# Altium PCB PCB1.PcbDoc
Units mm, origin at the board's own origin, x right, y up, seen from the top; angles counter-clockwise.
Board outline 87 x 17 mm, 2 copper layers (Top Layer, Bottom Layer), stack 1.571 mm thick; 19 components, 17 nets, 98 pads, 17 vias.
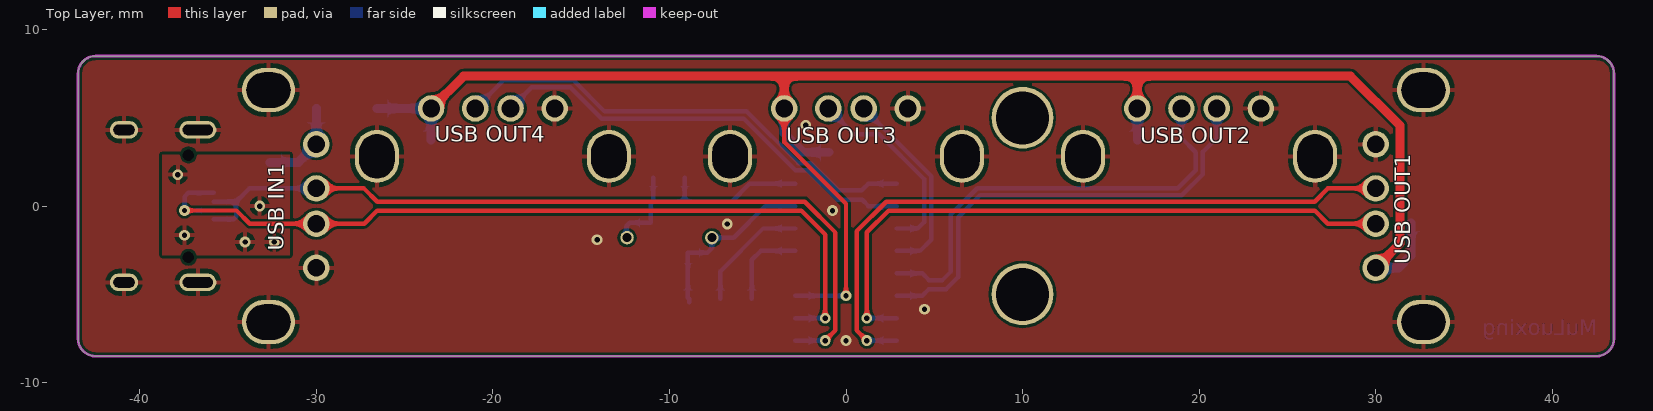
[diagram p0: Top Layer view]
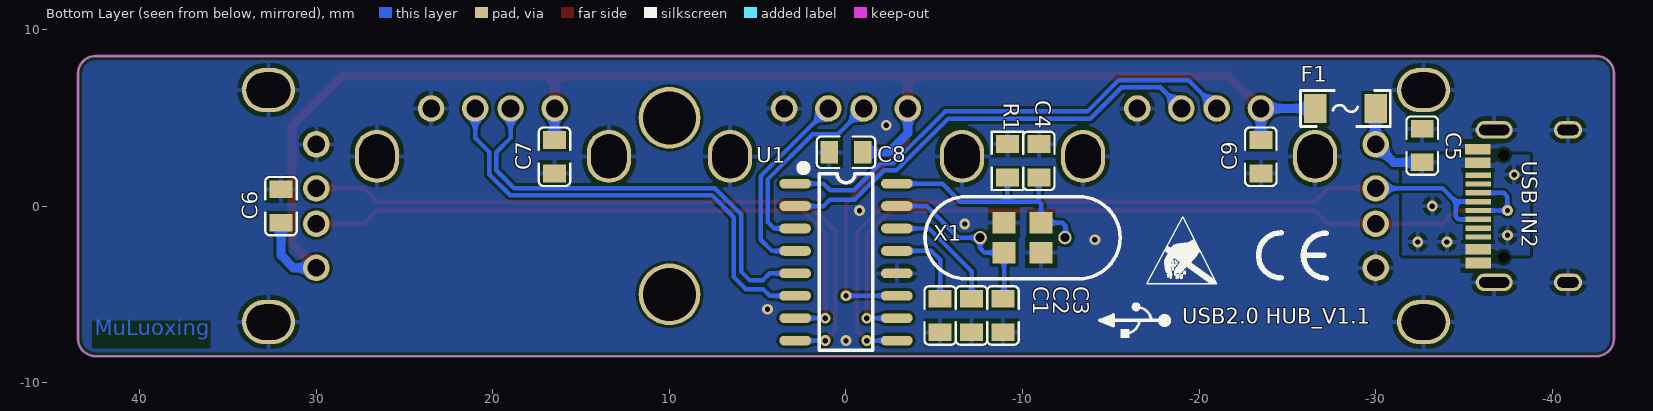
[diagram p1: Bottom Layer view, seen from below]
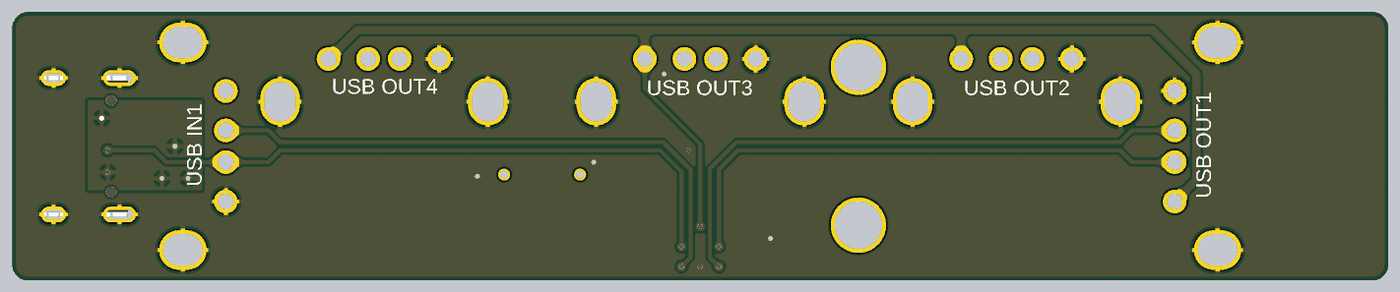
[diagram p2: 3D render of the assembled board from above, using the file's embedded part models]
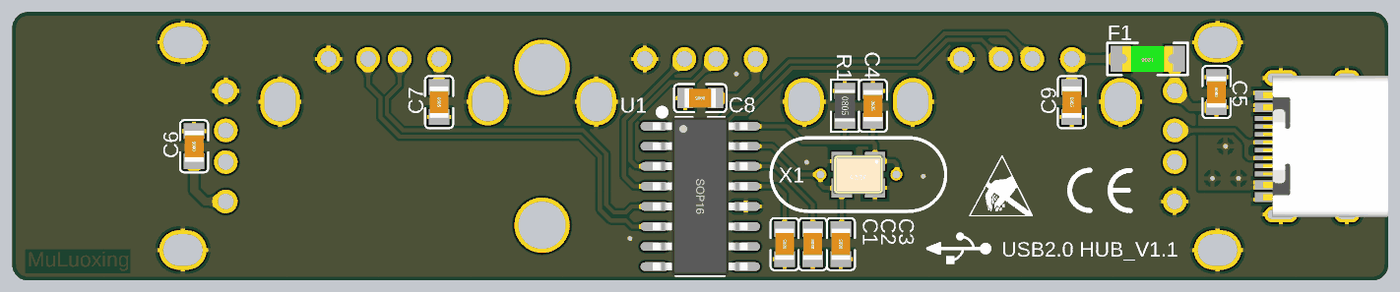
[diagram p3: 3D render of the assembled board from below, using the file's embedded part models]

## Layer stack, top to bottom
Top Solder: solder mask 0.0102, Solder Resist, Dk 3.5
Top Layer: signal copper 0.0356
Dielectric 1: dielectric 1.5, FR-4, Dk 4.8
Bottom Layer: signal copper 0.0356
Bottom Solder: solder mask 0.0102, Solder Resist, Dk 3.5

## Board outline
-43.5,-7.5 ccw(c-42.5,-7.5) -42.5,-8.5 42.5,-8.5 ccw(c42.5,-7.5) 43.5,-7.5 43.5,7.5 ccw(c42.5,7.5) 42.5,8.5 -42.5,8.5 ccw(c-42.5,7.5) -43.5,7.5

## Design rules (kind name [scope] priority, off if disabled: settings)
AssemblyTestPointUsage [All] p1 off:
AssemblyTestpoint [All] p1 off: testpointundercomponent=TRUE minsize=1.016 maxsize=2.54 preferedsize=1.524 minholesize=0 maxholesize=1.016 preferedholesize=0.813 testpointgrid=0.025 usegrid=TRUE gridtolerance=0 allowsidetop=TRUE allowsidebottom=TRUE
Clearance [All] p1: gap=0.152
ComponentClearance [All] p1 off: gap=0.254 collisioncheckmode=3 verticalgap=0.254 showdistances=FALSE
FabricationTestPointUsage [All] p1 off: valid=0 allowmultiple=FALSE
FabricationTestpoint [All] p1 off: side=3 testpointundercomponent=TRUE minsize=1.016 maxsize=2.54 preferedsize=1.524 minholesize=0 maxholesize=1.016 preferedholesize=0.813 testpointgrid=0.025 allowsidetop=TRUE allowsidebottom=TRUE usegrid=TRUE gridtolerance=0
Height [All] p1 off: minheight=0 maxheight=25.4 prefheight=12.7
HoleSize [All] p1 off: absolutevalues=TRUE maxlimit=2.54 minlimit=0.025 maxpercent=80.000 minpercent=20.000
HoleToHoleClearance [All] p1 off: gap=0.254 allowstackedmicrovias=TRUE
LayerPairs [All] p1 off: enforce=TRUE
MinimumSolderMaskSliver [All] p1 off: minsoldermaskwidth=0.254
NetAntennae [All] p1 off: netantennaetolerance=0
PlaneConnect [All] p1: planeconnectstyle=Relief reliefexpansion=0.508 reliefentries=4 reliefconductorwidth=0.508 reliefairgap=0.254
PolygonConnect [All] p1: connectstyle=Relief reliefconductorwidth=0.254 reliefentries=4 polygonreliefangle="90 Angle" airgapwidth=0.254
RoutingVias [All] p1: holewidth=0.711 width=1.27 viastyle="Through Hole" minholewidth=0.305 minwidth=0.61 maxholewidth=0.711 maxwidth=1.27
SilkToSilkClearance [All] p1 off: silktosilkclearance=0.254
SilkToSolderMaskClearance [IsPad] p1 off: minsilkscreentomaskgap=0.254 clearancetoexposedcopper=TRUE
SolderMaskExpansion [All] p1 off: expansion=0.102
Width [All] p1: maxlimit=0.762 minlimit=0.152 preferedwidth=0.254
16 further rules are at their usual default settings.

## Components (designator, comment, footprint, x,y, rotation, side; value= is the part's Value field where it differs from the comment)
C1 "10uF" "C 0805" -5.334,-6.199 r90 bottom
C2 "10uF" "C 0805" -7.112,-6.199 r90 bottom
C3 "20PF" "C 0805" -8.89,-6.199 r90 bottom
C4 "20PF" "C 0805" -10.922,2.564 r270 bottom
C5 "10uF" "C 0805" -32.639,3.429 r90 bottom
C6 "10uF" "C 0805" 32,0 r90 bottom
C7 "10uF" "C 0805" 16.51,2.794 r270 bottom
C8 "10uF" "C 0805" 0,3.048 r0 bottom
C9 "10uF" "C 0805" -23.495,2.794 r270 bottom
F1 "MSMD200-8V 2A" "FU 1206" -28.286,5.528 r0 bottom
R1 "0R" "R 0805" -9.144,2.564 r270 bottom
U1 "SL2.1A" SOP16_N 0,-3.175 r180 bottom
"USB IN1" "USB A" USB-A/S_A -30,0 r180 top
"USB IN2" "TYPE-C" "USB TYPE-C-16PIN_A" -40.894,0 r90 bottom
"USB OUT1" "USB A" USB-A/S_A 30,0 r0 top
"USB OUT2" "USB A" USB-A/S_A 20,5.528 r270 top
"USB OUT3" "USB A" USB-A/S_A 0,5.528 r270 top
"USB OUT4" "USB A" USB-A/S_A -20,5.528 r270 top
X1 "12MHz" OSC -10,-1.793 r0 bottom

## Footprints (in the part's own frame and the unit in brackets; to place one, negate y for a bottom-side part, rotate by r counter-clockwise, add the part's x,y. Pads: shape width x height; smd on the part's side, far side on the other; paste and mask are expansions set on the pad)
"C 0805" [mm] "贴片带丝印"
  rect 1x1.3 smd: 1(-0.95,0) 2(0.95,0)
  silkscreen extent -1.65,-0.89 1.65,0.89, body extent -1,-0.61 1,0.61, height 0.51
"FU 1206" [mil] "贴片保险丝"
  rect 50x65 smd: 1(-67.5,0) 2(67.5,0)
  silkscreen extent -100,-40 100,40, body extent -63,-32 63,32, height 34
OSC [mm]
  round 0.762 hole 0.508: 1(-2.4,0) 3(2.4,0)
  rect 1.3x1.2 smd: 1(-1.05,-0.85) 2(1.05,-0.85) 3(1.05,0.85) 4(-1.05,0.85)
  silkscreen extent -5.52,-2.32 5.52,2.33, body extent -1.6,-1.25 1.6,1.25, height 0.7
"R 0805" [mm] "贴片带丝印"
  rect 1x1.3 smd: 1(-0.95,0) 2(0.95,0)
  silkscreen extent -1.65,-0.89 1.65,0.89, body extent -1,-0.63 1,0.63, height 0.55
SOP16_N [mm] "10.3*6.2*1.8mm（长宽高）"
  oval 1.8x0.55 smd: 1(-2.877,4.445) 2(-2.877,3.175) 3(-2.877,1.905) 4(-2.877,0.635) 5(-2.877,-0.635) 6(-2.877,-1.905) 7(-2.877,-3.175) 8(-2.877,-4.445) 9(2.877,-4.445) 10(2.877,-3.175) 11(2.877,-1.905) 12(2.877,-0.635) 13(2.877,0.635) 14(2.877,1.905) 15(2.877,3.175) 16(2.877,4.445)
  silkscreen extent -2.57,-5 1.52,5.49, body extent -3,-5 3,5, height 1.9
"USB TYPE-C-16PIN_A" [mm]
  round 0 hole 0.65: 0(-2.89,3.65) 0(2.89,3.65)
  oval 1x1.6 hole 0.6 slot 1.2 at 90 deg: 1(-4.32,0) 1(4.32,0)
  oval 1x2.1 hole 0.6 slot 1.7 at 90 deg: 1(-4.32,4.18) 1(4.32,4.18)
  rect 0.3x1.45 smd: A1(-3.375,5.092) A4(-2.6,5.092) A5(-1.25,5.092) A6(-0.25,5.092) A7(0.25,5.092) A8(-1.75,5.092) A9(2.6,5.1) A12(3.375,5.1) B1(3.075,5.1) B4(2.3,5.1) B5(1.75,5.092) B6(0.75,5.092) B7(-0.75,5.092) B8(1.25,5.092) B9(-2.3,5.092) B12(-3.075,5.092)
  body extent -4.47,-2.6 4.47,5.3, height 3.25
USB-A/S_A [mm] "A型直插母头，"
  round 1.5 hole 1: 1(0,-3.5) 2(0,-1) 3(0,1) 4(0,3.5)
  oval 3x2.5 hole 2 slot 2.5 at 0 deg: 4(2.71,6.57) 4(2.71,-6.57)
  body extent -0.6,-7.34 13.7,7.34, height 6.8

## Part data
C1 C2 C3 C4 C5 C6 C7 C8 C9: library part Cap1
F1: library part FU, "贴片保险丝"
R1: library part Res
"USB IN2": library part "TYPE-C 16PIN"
X1: library part XTAL-4P, "4脚无源晶振"

## Free pads (board coordinates)
  round 3.5 hole 3: 0(10,-5) 0(10,5)

## Via types
v1: diameter 0.61, hole 0.305, Top Layer to Bottom Layer, tented both sides, 17 vias

## Nets (pads, with @x,y where several pads share a name; then routed paths per layer and width w, separated by ;. In a path a pad name is that pad's centre, name@x,y a point inside that pad or via, vN(x,y) a via of type N, cw(c..) or ccw(c..) an arc to the next point about the centre after c; other vN are vias at no path point)
5V: "USB OUT1.1" "USB OUT2.1" "USB OUT3.1" "USB OUT4.1" C6.1 C7.1 C8.1 C9.1 F1.2 U1.11 | length 99.2
  Top Layer w0.254: -3.5,5.528 -3.5,3.627 0,0.127 v1(0,-5.08)
  Top Layer w0.508: -23.5,5.528 -21.662,7.366 -3.5,7.366 ; -3.5,5.528 -3.5,7.366 ; 16.5,5.528 16.5,7.366 ; 30,-3.5 31.369,-2.131 31.369,4.572 28.575,7.366 16.5,7.366 ; -3.5,7.366 16.5,7.366
  Bottom Layer w0.254: U1.11 v1(0,-5.08)
  Bottom Layer w0.508: F1.2 -23.5,5.528 -23.495,5.523 C9.1 ; -3.5,5.528 -3.5,4.135 -2.413,3.048 C8.1 ; 16.5,5.528 16.51,5.518 C7.1 ; 30,-3.5 31.298,-3.5 32,-2.798 C6.1
DM: "USB IN1.2" "USB IN2.A7" "USB IN2.B7" U1.9 | length 46.8
  Top Layer w0.254: -30,1 -27.305,1 -26.559,0.254 -2.336,0.254 ; -2.336,0.238 -0.598,-1.5 -0.598,-7.036 v1(-1.182,-7.62)
  Bottom Layer w0.254: -35.802,-0.75 -34.684,-0.75 -34.544,-0.611 -34.544,0.25 ; -35.802,0.25 -34.544,0.25 ; -30,1 -33.794,1 -34.544,0.25 ; U1.9 v1(-1.182,-7.62)
DM1: "USB OUT1.2" U1.7 | length 36.2
  Top Layer w0.254: v1(1.182,-6.35) 1.182,-1.485 2.413,-0.254 26.543,-0.254 27.289,-1 30,-1
  Bottom Layer w0.254: v1(1.182,-6.35) U1.7
DM2: "USB OUT2.2" U1.5 | length 25.4
  Bottom Layer w0.254: U1.5 4.318,-3.81 4.699,-4.191 5.461,-4.191 5.944,-3.708 5.944,-0.467 7.426,1.016 18.796,1.016 19.812,2.032 19.812,3.048 19,3.86 19,5.528
DM3: "USB OUT3.2" U1.3 | length 11.2
  Bottom Layer w0.254: -1,5.528 0.317,4.212 0.464,4.064 1.89,4.064 4.42,1.534 4.42,-0.914 4.064,-1.27 U1.3
DM4: "USB OUT4.2" U1.1 | length 27.3
  Bottom Layer w0.254: -21,5.528 -19.391,7.137 -15.453,7.137 -13.675,5.359 -5.613,5.359 -2.692,2.438 -1.991,2.438 -0.441,0.889 0.889,0.889 1.27,1.27 U1.1
DP: "USB IN1.3" "USB IN2.A6" "USB IN2.B6" U1.10 | length 48.1
  Top Layer w0.254: v1(-37.465,-0.25) -34.523,-0.25 -33.774,-1 -30,-1 -27.289,-1 -26.543,-0.254 -2.54,-0.254 -1.182,-1.612 v1(-1.182,-6.35)
  Bottom Layer w0.254: -35.802,-0.25 v1(-37.465,-0.25) -37.465,0.532 -37.248,0.75 -35.802,0.75 ; U1.10 v1(-1.182,-6.35)
DP1: "USB OUT1.3" U1.8 | length 38.5
  Top Layer w0.254: v1(1.182,-7.62) 0.598,-7.036 0.598,-1.434 2.286,0.254 26.543,0.254 27.289,1 30,1
  Bottom Layer w0.254: v1(1.182,-7.62) U1.8
DP2: "USB OUT2.3" U1.6 | length 26.2
  Bottom Layer w0.254: U1.6 4.318,-5.08 4.699,-4.699 5.671,-4.699 6.35,-4.02 6.35,-0.635 7.595,0.61 19.025,0.61 20.218,1.803 20.218,3.073 21,3.855 21,5.528
DP3: "USB OUT3.3" U1.4 | length 11.2
  Bottom Layer w0.254: 1,5.528 4.826,1.702 4.826,-1.905 4.191,-2.54 U1.4
DP4: "USB OUT4.3" U1.2 | length 25.2
  Bottom Layer w0.254: -19,5.528 -17.797,6.731 -15.621,6.731 -13.843,4.953 -5.782,4.953 -2.861,2.032 -2.159,2.032 -0.483,0.356 0.914,0.356 1.27,0 U1.2
GND: "USB IN1.4" "USB IN2.1" "USB IN2.A1" "USB IN2.A12" "USB IN2.B1" "USB IN2.B12" "USB OUT1.4" "USB OUT2.4" "USB OUT3.4" "USB OUT4.4" C1.1 C2.1 C3.1 C4.1 C5.2 C6.2 C7.2 C8.2 C9.2 R1.1 U1.12 X1.2 X1.4
  other v1: 0,-7.62 4.445,-5.842 -14.097,-1.905 -6.731,-1.016 -0.762,-0.254 -2.286,4.572
NetC1_2: C1.2 U1.13 | length 4.9
  Bottom Layer w0.254: C1.2 -5.334,-3.048 -4.826,-2.54 U1.13
NetC2_2: C2.2 U1.14 | length 6.8
  Bottom Layer w0.254: C2.2 -7.112,-3.683 -4.699,-1.27 U1.14
VIN: "USB IN1.1" "USB IN2.A4" "USB IN2.A9" "USB IN2.B4" "USB IN2.B9" C5.1 F1.1 | length 5.1
  Bottom Layer w0.508: C5.1 -31.021,2.479 -30,3.5 F1.1@-30,5.528
  other v1: -34.036,-2.032 -32.385,-2.032 -37.465,-1.651 -33.21,0 -37.846,1.778
XIN: C4.2 R1.2 U1.16 X1.1 | length 14.6
  Bottom Layer w0.254: X1.1@-12.4,-1.793 -12.446,-1.747 -12.446,-1.143 -12.246,-0.943 -11.05,-0.943 -11.05,0.126 -10.922,0.254 ; C4.2 -10.922,0.254 ; R1.2 -9.144,0.254 ; U1.16 -5.461,1.27 -6.477,0.254 -9.144,0.254 ; -10.922,0.254 -9.144,0.254
XOUT: C3.2 U1.15 X1.3 | length 10.4
  Bottom Layer w0.254: C3.2@-8.89,-5.461 C3.2 -8.95,-5.189 -8.95,-2.643 -7.85,-2.643 -7.6,-2.393 -7.6,-1.793 -6.365,-1.793 -4.572,0 U1.15
pads on no net: "USB IN2.0" "USB IN2.A5" "USB IN2.A8" "USB IN2.B5" "USB IN2.B8"

## Polygon pours and split planes (outlines as drawn)
GND on Bottom Layer "Top Layer-No Net" (solid, pour order 10): -42.5,8.5 ccw(c-42.5,7.5) -43.5,7.5 -43.5,7.493 -43.5,-7.5 ccw(c-42.5,-7.5) -42.5,-8.5 42.5,-8.5 ccw(c42.5,-7.5) 43.5,-7.5 43.5,7.5 ccw(c42.5,7.5) 42.5,8.5
VIN on Bottom Layer "Top Layer-No Net" (solid, pour order 4): -35.687,2.921 -38.735,2.921 -38.735,-2.794 -31.496,-2.794 -31.496,2.921
GND on Top Layer "Top Layer-No Net" (solid, pour order 8): -42.5,8.5 ccw(c-42.5,7.5) -43.5,7.5 -43.5,-7.5 ccw(c-42.5,-7.5) -42.5,-8.5 42.5,-8.5 ccw(c42.5,-7.5) 43.5,-7.5 43.5,7.5 ccw(c42.5,7.5) 42.5,8.5
VIN on Top Layer "Top Layer-No Net" (solid, pour order 6): -35.687,2.921 -38.735,2.921 -38.735,-2.794 -31.496,-2.794 -31.496,2.921

## Keep-outs
Keep-Out Layer:
  the board outline again, w0.152

## Other copper
Bottom Layer:
  text "MuLuoxing" at 42.545,-7.62 h1.5

## Silkscreen, mask and mechanical layers (free items; w line width, h text height)
Bottom Overlay:
  drawing of 27 lines, arcs and shapes, not listed
  text "USB2.0 HUB_V1.1" at -19.05,-6.985 h1.5